# Allegro board FIBER-E1_01v0.brd
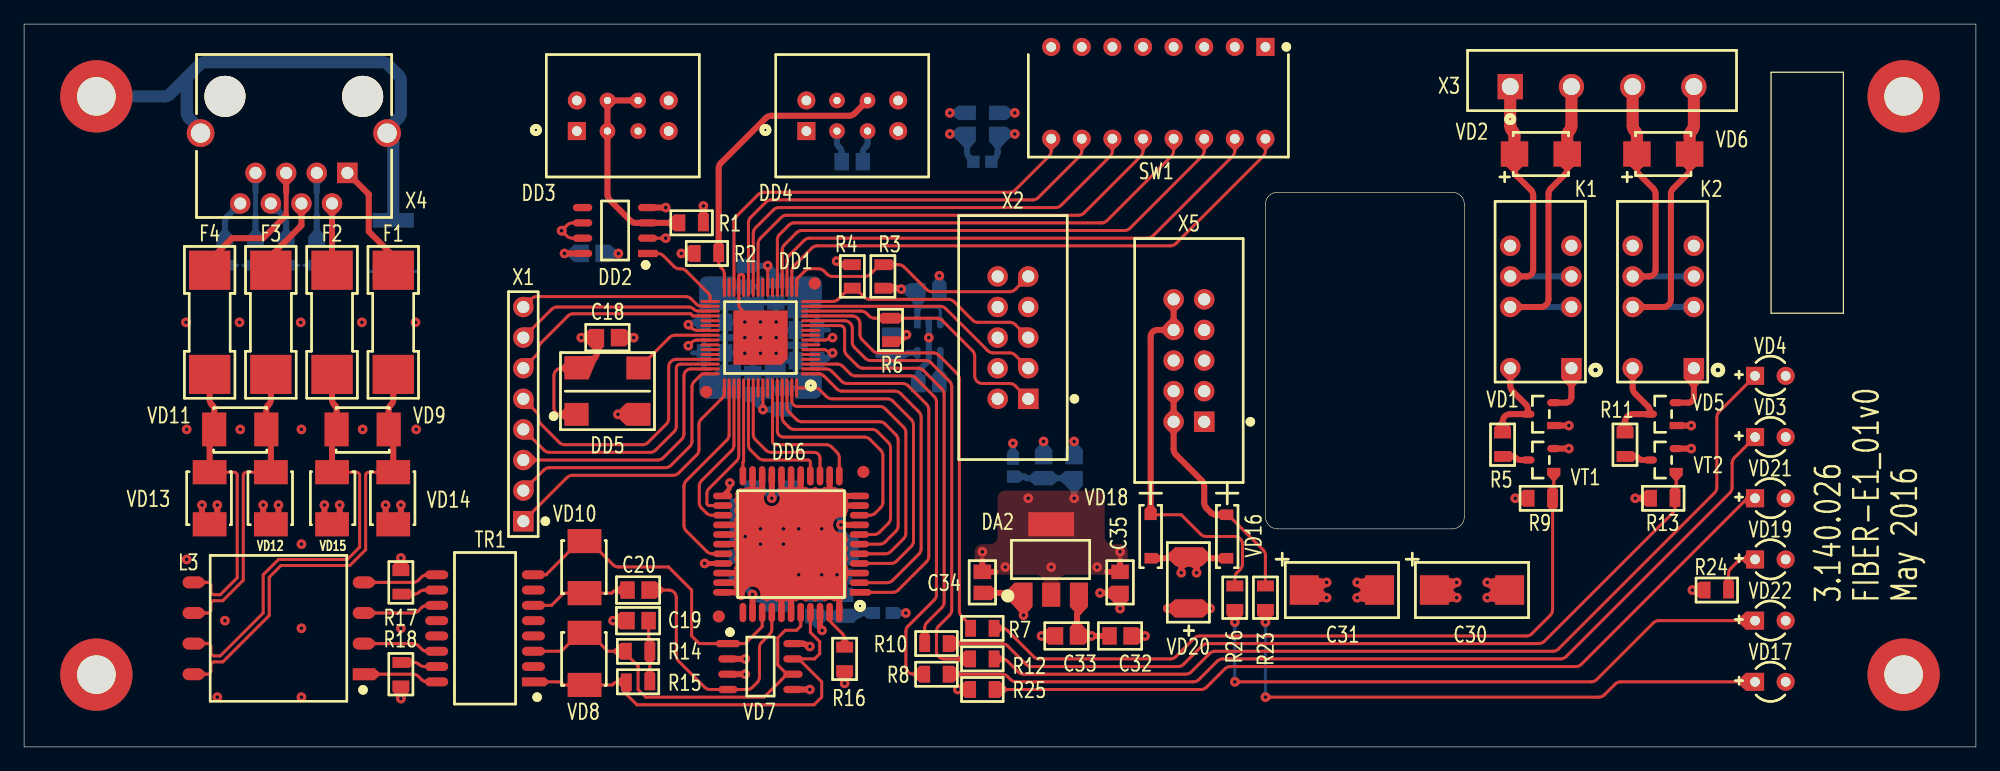
[diagram p0: board, top side]
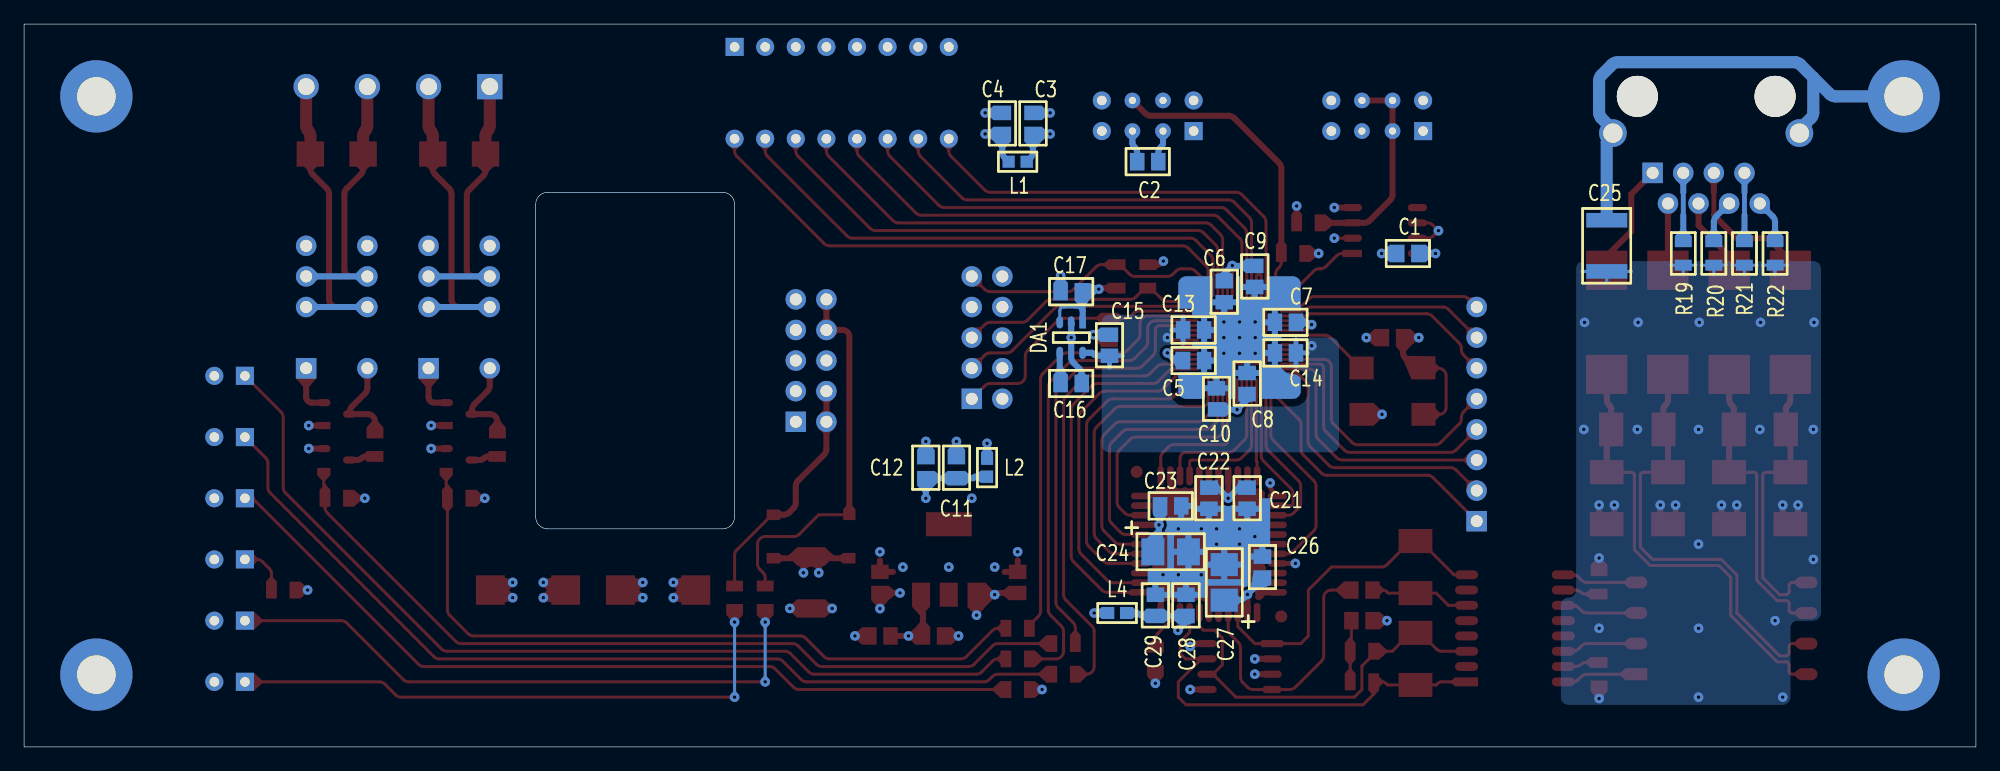
[diagram p1: board, bottom side, seen from below]

Outline 162 x 60 mm; copper layers: TOP, GND, PWR, BOTTOM. Coordinates in mm from the lower left corner of the outline.
Outline path: 0,60 0,0 162,0 162,60 0,60 ; 103.03,45.04 103.03,19.1 arc(103.32,18.39) 104.03,18.1 118.54,18.1 arc(119.25,18.39) 119.54,19.1 119.54,45.04 arc(119.25,45.75) 118.54,46.04 104.03,46.04 arc(103.32,45.75) 103.03,45.04

## Design rules (mm)
net group 2RX: nets 2RX+ 2RX-
net group 2TX: nets 2TX+ 2TX-
net group 3RX: nets 3RX+ 3RX-
net group 3TX: nets 3TX+ 3TX-
net group RX: nets RRING RTIP
net group TX: nets TRING TTIP
nets with their own width: min track width 1; nets SHLD

## Placement (name value [footprint] x y rotation side)
C1  0.1uF  [CAPC2012X130N]  47.15 40.96 0 bottom
C2  0.1uF  [CAPC2012X130N]  68.74 48.58 0 bottom
C3  2.2uF  [CAPC2012X130N]  78.27 51.76 90 bottom
C4  2.2uF  [CAPC2012X130N]  80.81 51.76 90 bottom
C5  0.1uF  [CAPC2012X130N]  64.93 32.07 180 bottom
C6  0.1uF  [CAPC2012X130N]  62.39 37.78 270 bottom
C7  0.1uF  [CAPC2012X130N]  57.31 35.24 0 bottom
C8  0.1uF  [CAPC2012X130N]  60.48 30.16 90 bottom
C9  2.2uF  [CAPC2012X130N]  59.85 39.05 270 bottom
C10  2.2uF  [CAPC2012X130N]  63.02 28.89 90 bottom
C11  0.1uF  [CAPC2012X130N]  84.61 23.18 90 bottom
C12  10uF  [CAPC2012X130N]  87.16 23.18 90 bottom
C13  0.1uF  [CAPC2012X130N]  64.93 34.61 180 bottom
C14  0.1uF  [CAPC2012X130N]  57.31 32.7 0 bottom
C15  2.2uF  [CAPC2012X130N]  71.92 33.34 90 bottom
C16  0.01uF  [CAPC2012X130N]  75.09 30.16 0 bottom
C17  2.2uF  [CAPC2012X130N]  75.09 37.78 0 bottom
C18  0.01uF  [CAPC2012X130N]  48.42 33.98 180 top
C19  0.1uF  [CAPC2012X130N]  50.96 10.48 0 top
C20  1uF  [CAPC2012X130N]  50.96 13.02 180 top
C21  0.1uF  [CAPC2012X130N]  60.48 20.64 270 bottom
C22  2.2uF  [CAPC2012X130N]  63.66 20.64 270 bottom
C23  0.1uF  [CAPC2012X130N]  66.83 20 180 bottom
C24  68uF  [CAPMP3528X190N]  66.83 16.2 180 bottom
C25  1000pF  [CAPC4532X120N]  30.64 41.59 270 bottom
C26  0.1uF  [CAPC2012X130N]  59.22 14.93 90 bottom
C27  68uF  [CAPMP3528X190N]  62.39 13.65 90 bottom
C28  0.1uF  [CAPC2012X130N]  65.56 11.75 90 bottom
C29  2.2uF  [CAPC2012X130N]  68.11 11.75 90 bottom
C30  220uF  [CAPMP7343X280N]  120.17 13.02 0 top
C31  220uF  [CAPMP7343X280N]  109.38 13.02 0 top
C32  10uF  [CAPC2012X130N]  90.97 9.21 0 top
C33  0.1uF  [CAPC2012X130N]  86.52 9.21 180 top
C34  10uF  [CAPC2012X130N]  79.53 13.65 270 top
C35  0.1uF  [CAPC2012X130N]  90.97 13.65 270 top
DA1  LP2985AIM5-1.8  [SOT95P280X112-5N]  75.09 33.98 270 bottom
DA2  ADP3339AKCZ-3.3  [SOT230P700X180-4N]  85.25 15.56 90 top
DD1  5M80ZE64C5N  [QFP40P900X900X120-65N_V1]  61.12 33.98 180 top
DD2  SN75451BD  [SOIC127P600X175-8N]  49.05 42.87 180 top
DD3  HFBR-1414Z  [AVAGO_HFBR-X41XZ]  45.88 51.12 180 top
DD4  HFBR-2412Z  [AVAGO_HFBR-X41XZ]  64.93 51.12 180 top
DD5  65.536MHz  [OSCCC500X700X140-4N]  48.42 29.53 0 top
DD6  82V2081PPG  [TQFP80P1200X1200X160-44N]  63.66 16.83 180 top
F1  04611.25ER  [FUS10132X312N]  30.64 35.24 90 top
F2  04611.25ER  [FUS10132X312N]  25.56 35.24 90 top
F3  04611.25ER  [FUS10132X312N]  20.48 35.24 90 top
F4  04611.25ER  [FUS10132X312N]  15.4 35.24 90 top
K1  G6S-2 5VDC  [RELAY_G6S224DC]  125.89 37.78 180 top
K2  G6S-2 5VDC  [RELAY_G6S224DC]  136.05 37.78 180 top
L1  BLM18HE152SN1  [INDC1608X80N]  79.53 48.58 0 bottom
L2  BLM18HE152SN1  [INDC1608X80N]  82.08 23.18 270 bottom
L3  PE-65857NL  [SOIC254P1509X864-8N]  21.11 9.85 180 top
L4  BLM18HE152SN1  [INDC1608X80N]  71.28 11.12 0 bottom
NOREF  -  []  0 0 0 top
NOREF#2  -  []  0 0 0 top
NOREF#3  VAL  [unnamed#2]  6 6 0 top
NOREF#4  VAL  [unnamed#2]  156 54 0 top
NOREF#5  VAL  [unnamed#2]  156 6 0 top
NOREF#6  -  []  0 60 90 top
NOREF#7  -  []  6 6 90 top
NOREF#8  -  []  162 0 90 top
NOREF#9  -  []  0 60 90 top
NOREF#10  -  []  6 6 0 top
NOREF#11  -  []  0 0 90 top
R1  39  [RESC2013X50N]  55.41 43.5 0 top
R2  510  [RESC2013X50N]  56.67 40.96 0 top
R3  10k  [RESC2013X50N]  71.28 39.05 270 top
R4  10k  [RESC2013X50N]  68.74 39.05 90 top
R5  5.1  [RESC2013X50N]  122.72 25.09 90 top
R6  1k  [RESC2013X50N]  71.92 34.61 90 top
R7  510  [RESC2013X50N]  79.53 9.85 0 top
R8  270  [RESC2013X50N]  75.72 6.04 0 top
R9  5.1k  [RESC2013X50N]  125.89 20.64 0 top
R10  510  [RESC2013X50N]  75.72 8.57 0 top
R11  5.1  [RESC2013X50N]  132.88 25.09 90 top
R12  270  [RESC2013X50N]  79.53 7.3 0 top
R13  5.1k  [RESC2013X50N]  136.05 20.64 0 top
R14  60.4  [RESC2013X50N]  50.96 7.94 0 top
R15  60.4  [RESC2013X50N]  50.96 5.4 0 top
R16  3.01k  [RESC2013X50N]  68.11 7.3 90 top
R17  75  [RESC2013X50N]  31.27 13.65 270 top
R18  75  [RESC2013X50N]  31.27 6.04 90 top
R19  75  [RESC2013X50N]  24.29 40.96 90 bottom
R20  75  [RESC2013X50N]  21.75 40.96 90 bottom
R21  75  [RESC2013X50N]  19.21 40.96 90 bottom
R22  75  [RESC2013X50N]  16.67 40.96 90 bottom
R23  510  [RESC2013X50N]  103.03 12.38 270 top
R24  510  [RESC2013X50N]  140.5 13.02 180 top
R25  240  [RESC2013X50N]  79.53 4.76 0 top
R26  510  [RESC2013X50N]  100.49 12.38 270 top
SW1  SWD-08R  [SW_SWD-08R]  103.03 58.1 180 top
TP1  TP  [KP_W310H180]  6 54 0 top
TR1  T1094NL  [SOIC127P928X622-16N]  38.26 9.85 180 top
VD1  BAT54S  [SOT95P230X110-3N]  125.89 27.62 180 top
VD2  300V  [DIOM5436X230N]  125.89 49.22 180 top
VD3  LOS_FI  [LEDRR254W47L320T320H460N]  144.94 25.72 0 top
VD4  LOS_E1  [LEDRR254W47L320T320H460N]  144.94 30.8 0 top
VD5  BAT54S  [SOT95P230X110-3N]  136.05 27.62 180 top
VD6  300V  [DIOM5436X230N]  136.05 49.22 180 top
VD7  SRDA05-4BTG  [SOIC127P600X175-8N]  61.12 6.67 0 top
VD8  P0080SAMCLRP  [DIOM5336X265N_PAD200_300]  46.52 7.3 90 top
VD9  P0300SCMCLRP  [DIOM5336X265N_PAD200_300]  28.1 26.36 180 top
VD10  P0080SAMCLRP  [DIOM5336X265N_PAD200_300]  46.52 14.93 90 top
VD11  P0300SCMCLRP  [DIOM5336X265N_PAD200_300]  17.94 26.36 180 top
VD12  P1800SCMCLRP  [DIOM5336X265N_PAD200_300]  20.48 20.64 90 top
VD13  P1800SCMCLRP  [DIOM5336X265N_PAD200_300]  15.4 20.64 90 top
VD14  P1800SCMCLRP  [DIOM5336X265N_PAD200_300]  30.64 20.64 90 top
VD15  P1800SCMCLRP  [DIOM5336X265N_PAD200_300]  25.56 20.64 270 top
VD16  MBR0540  [SOT95P375X128-2N]  99.86 17.46 90 top
VD17  220V  [LEDRR254W47L320T320H460N]  144.94 5.4 0 top
VD18  MBR0540  [SOT95P375X128-2N]  93.5 17.46 90 top
VD19  5V  [LEDRR254W47L320T320H460N]  144.94 15.56 0 top
VD20  6V8  [DIOM5336X265N]  96.68 13.65 270 top
VD21  3.3V  [LEDRR254W47L320T320H460N]  144.94 20.64 0 top
VD22  48V  [LEDRR254W47L320T320H460N]  144.94 10.48 0 top
VT1  IRLML6344  [SOT95P230X110-3N]  125.89 23.82 180 top
VT2  IRLML6344  [SOT95P230X110-3N]  136.05 23.82 180 top
X1  TP CPLD  [PLS-8]  41.44 18.73 90 top
X2  JTAG  [SHDR0S254P5X2_2025X900X900]  83.34 28.89 90 top
X3  RELAY  [PHOENIX_1757268]  123.35 54.81 180 top
X4  1-5406299-1  [TE_1-5406299-1]  19.21 47.65 180 top
X5  IDC-10M  [SHDR0S254P5X2_2025X900X900]  97.95 26.99 90 top

## Library data of the parts
C1-C23 C25 C26 C28 C29 C32-C35 = CAPACITOR
C24 C27 C30 C31 = CAPACITOR_POL
DA1 = LP2985_5
DA2 = LM1117
DD1 = 5M80ZE64_38: alternate symbols: (QFP40P900X900X120-65N_v2)
DD2 = SN75451B_8
DD3 = HFBR-1414Z_7
DD4 = HFBR-24x2Z_6
DD5 = OSC_SMD_3
DD6 = IDT82V2081_11
F1-F4 = EFUSE
K1 K2 = G6S224DC
L1 L2 L4 = INDUCTOR
L3 = PE-65857NL
R1-R26 = R_0.125W
SW1 = SW8
TP1 = TP
TR1 = T1094NL_0
VD1 VD5 = BAT54S
VD2 VD6 = SUPRESSOR
VD3 VD4 VD17 VD19 VD21 VD22 = LED
VD7 = SRDA05_0
VD8-VD15 = THYRISTOR_2
VD16 VD18 = SHOTTKY
VD20 = SUPRESSOR_POL
VT1 VT2 = MOS_n_channel_induced_1
X1 = CONN8
X2 = CONN10_1
X3 = CONN4_1
X4 = TJ8P8C_SHIELD_2
X5 = CONN10

## Footprints (pads in the part's own frame, mm; a bottom-side part is the same pattern mirrored in y, then rotated)
AVAGO_HFBR-X41XZ
  rect 1.5x1.5 hole 0.8: 1(0,0)
  round 1.3 hole 0.6: 2(-2.54,0) 3(-5.08,0) 6(-5.08,-2.54) 7(-2.54,-2.54)
  round 1.5 hole 0.8: 4(-7.62,0) 5(-7.62,-2.54) 8(0,-2.54)
CAPC2012X130N
  rect 1.2x1.45 smd: 1(-0.875,0) 2(0.875,0)
CAPC4532X120N
  rect 1.2x3.4 smd: 1(-2.125,0) 2(2.125,0)
CAPMP3528X190N
  rect 1.9x2.25 smd: 1(-1.475,0) 2(1.475,0)
CAPMP7343X280N
  rect 2.4x2.45 smd: 1(-3.125,0) 2(3.125,0)
DIOM5336X265N
  rect 1.52x2.3 smd: 1(-2.162,0) 2(2.162,0)
DIOM5336X265N_PAD200_300
  rect 2x2.8 smd: 1(-2.162,0) 2(2.162,0)
DIOM5436X230N
  rect 2.275x2.1 smd: 1(-2.188,0) 2(2.188,0)
FUS10132X312N
  rect 3.25x3.43 smd: 1(-4.325,0) 2(4.325,0)
INDC1608X80N
  rect 1.025x1 smd: 1(-0.75,0) 2(0.75,0)
KP_W310H180
  round 6 hole 3.2: 1(0,0)
LEDRR254W47L320T320H460N
  rect 1.5x1.5 hole 0.8: 1(-1.27,0)
  round 1.5 hole 0.8: 2(1.27,0)
OSCCC500X700X140-4N
  rect 2x1.9 smd: 1(-2.57,-1.925) 2(2.57,-1.925) 3(2.57,1.925) 4(-2.57,1.925)
PHOENIX_1757268
  rect 2.1x2.1 hole 1.4: 1(0,0)
  round 2.1 hole 1.4: 2(-5.08,0) 3(-10.16,0) 4(-15.24,0)
PLS-8
  rect 1.7x1.7 hole 1: 1(0,0)
  round 1.7 hole 1: 2(2.54,0) 3(5.08,0) 4(7.62,0) 5(10.16,0) 6(12.7,0) 7(15.24,0) 8(17.78,0)
QFP40P900X900X120-65N_V1
  round 1 smd: (-4.5,-4.5) (4.5,4.5)
  rect 1.6x0.25 smd: 1(-4.175,3)
  oval 1.6x0.25 smd: 2(-4.175,2.6) 3(-4.175,2.2) 4(-4.175,1.8) 5(-4.175,1.4) 6(-4.175,1) 7(-4.175,0.6) 8(-4.175,0.2) 9(-4.175,-0.2) 10(-4.175,-0.6) 11(-4.175,-1) 12(-4.175,-1.4) 13(-4.175,-1.8) 14(-4.175,-2.2) 15(-4.175,-2.6) 16(-4.175,-3) 33(4.175,-3) 34(4.175,-2.6) 35(4.175,-2.2) 36(4.175,-1.8) 37(4.175,-1.4) 38(4.175,-1) 39(4.175,-0.6) 40(4.175,-0.2) 41(4.175,0.2) 42(4.175,0.6) 43(4.175,1) 44(4.175,1.4) 45(4.175,1.8) 46(4.175,2.2) 47(4.175,2.6) 48(4.175,3)
  oval 0.25x1.6 smd: 17(-3,-4.175) 18(-2.6,-4.175) 19(-2.2,-4.175) 20(-1.8,-4.175) 21(-1.4,-4.175) 22(-1,-4.175) 23(-0.6,-4.175) 24(-0.2,-4.175) 25(0.2,-4.175) 26(0.6,-4.175) 27(1,-4.175) 28(1.4,-4.175) 29(1.8,-4.175) 30(2.2,-4.175) 31(2.6,-4.175) 32(3,-4.175) 49(3,4.175) 50(2.6,4.175) 51(2.2,4.175) 52(1.8,4.175) 53(1.4,4.175) 54(1,4.175) 55(0.6,4.175) 56(0.2,4.175) 57(-0.2,4.175) 58(-0.6,4.175) 59(-1,4.175) 60(-1.4,4.175) 61(-1.8,4.175) 62(-2.2,4.175) 63(-2.6,4.175) 64(-3,4.175)
  custom 4.5x4.5 smd: EPAD(0,0)
RELAY_G6S224DC
  rect 1.7x1.7 hole 1: 1(-2.54,6.35)
  round 1.7 hole 1: 3(-2.54,1.27) 4(-2.54,-1.27) 5(-2.54,-3.81) 8(2.54,-3.81) 9(2.54,-1.27) 10(2.54,1.27) 12(2.54,6.35)
RESC2013X50N
  rect 0.9x1.4 smd: 1(-0.975,0) 2(0.975,0)
SHDR0S254P5X2_2025X900X900
  rect 1.7x1.7 hole 1: 1(0,0)
  round 1.7 hole 1: 2(0,2.54) 3(2.54,0) 4(2.54,2.54) 5(5.08,0) 6(5.08,2.54) 7(7.62,0) 8(7.62,2.54) 9(10.16,0) 10(10.16,2.54)
SOIC127P600X175-8N
  rect 1.6x0.6 smd: 1(-2.7,1.905)
  oval 1.6x0.6 smd: 2(-2.7,0.635) 3(-2.7,-0.635) 4(-2.7,-1.905) 5(2.7,-1.905) 6(2.7,-0.635) 7(2.7,0.635) 8(2.7,1.905)
SOIC127P928X622-16N
  rect 1.91x0.74 smd: 1(-4.015,4.445)
  oval 1.91x0.74 smd: 2(-4.015,3.175) 3(-4.015,1.905) 4(-4.015,0.635) 5(-4.015,-0.635) 6(-4.015,-1.905) 7(-4.015,-3.175) 8(-4.015,-4.445) 9(4.015,-4.445) 10(4.015,-3.175) 11(4.015,-1.905) 12(4.015,-0.635) 13(4.015,0.635) 14(4.015,1.905) 15(4.015,3.175) 16(4.015,4.445)
SOIC254P1509X864-8N
  rect 1.8x1 smd: 1(-7.062,3.81)
  oval 1.8x1 smd: 2(-7.062,1.27) 3(-7.062,-1.27) 4(-7.062,-3.81) 5(7.062,-3.81) 6(7.062,-1.27) 7(7.062,1.27) 8(7.062,3.81)
SOT95P230X110-3N
  rect 1.1x0.6 smd: 1(-1.075,0.95)
  oval 1.1x0.6 smd: 2(-1.075,-0.95) 3(1.075,0)
SOT95P280X112-5N
  rect 1x0.55 smd: 1(-1.262,0.95)
  oval 1x0.55 smd: 2(-1.262,0) 3(-1.262,-0.95) 4(1.262,-0.95) 5(1.262,0.95)
SOT95P375X128-2N
  rect 0.88x1.02 smd: 1(-1.805,0) 2(1.805,0)
SOT230P700X180-4N
  rect 2x1.5 smd: 1(-2.925,2.3) 2(-2.925,0) 3(-2.925,-2.3)
  rect 2x3.8 smd: 4(2.925,0)
SW_SWD-08R
  rect 1.5x1.5 hole 0.8: 1(0,0)
  round 1.5 hole 0.8: 2(2.54,0) 3(5.08,0) 4(7.62,0) 5(10.16,0) 6(12.7,0) 7(15.24,0) 8(17.78,0) 9(17.78,7.62) 10(15.24,7.62) 11(12.7,7.62) 12(10.16,7.62) 13(7.62,7.62) 14(5.08,7.62) 15(2.54,7.62) 16(0,7.62)
TE_1-5406299-1
  round 3.4 hole 3.4: (-8.89,-6.35) (2.54,-6.35)
  rect 1.7x1.7 hole 1: 1(-7.62,0)
  round 1.7 hole 1: 2(-6.35,2.54) 3(-5.08,0) 4(-3.81,2.54) 5(-2.54,0) 6(-1.27,2.54) 7(0,0) 8(1.27,2.54)
  round 2.3 hole 1.6: SHIELD1(-10.92,-3.3) SHIELD2(4.56,-3.3)
TQFP80P1200X1200X160-44N
  round 1 smd: (-6,-6) (6,6)
  rect 1.6x0.55 smd: 1(-5.675,4)
  oval 1.6x0.55 smd: 2(-5.675,3.2) 3(-5.675,2.4) 4(-5.675,1.6) 5(-5.675,0.8) 6(-5.675,0) 7(-5.675,-0.8) 8(-5.675,-1.6) 9(-5.675,-2.4) 10(-5.675,-3.2) 11(-5.675,-4) 23(5.675,-4) 24(5.675,-3.2) 25(5.675,-2.4) 26(5.675,-1.6) 27(5.675,-0.8) 28(5.675,0) 29(5.675,0.8) 30(5.675,1.6) 31(5.675,2.4) 32(5.675,3.2) 33(5.675,4)
  oval 0.55x1.6 smd: 12(-4,-5.675) 13(-3.2,-5.675) 14(-2.4,-5.675) 15(-1.6,-5.675) 16(-0.8,-5.675) 17(0,-5.675) 18(0.8,-5.675) 19(1.6,-5.675) 20(2.4,-5.675) 21(3.2,-5.675) 22(4,-5.675) 34(4,5.675) 35(3.2,5.675) 36(2.4,5.675) 37(1.6,5.675) 38(0.8,5.675) 39(0,5.675) 40(-0.8,5.675) 41(-1.6,5.675) 42(-2.4,5.675) 43(-3.2,5.675) 44(-4,5.675)
unnamed#2
  round 6 hole 3.2: 1(0,0)

## Nets
GND: C1.2 C2.2 C3.2 C4.2 C5.2 C6.2 C7.2 C8.2 C9.2 C10.2 C11.2 C12.2 C13.2 C14.2 C15.2 C16.1 C17.2 C18.1 C19.1 C21.2 C22.2 C23.2 C24.2 C26.2 C27.2 C28.2 C29.2 C30.2 C31.2 C32.2 C33.2 C34.2 C35.2 DA1.2(GND) DA2.1(GND) DD1.28(OE) DD1.29(CLRN) DD1.EPAD(GND) DD2.4(GND) DD3.1(NC#1) DD3.3(CATHODE) DD3.4(NC#4) DD3.5(NC#5) DD3.8(NC#8) DD4.1(NC#1) DD4.3(COM#3) DD4.4(NC#4) DD4.5(NC#5) DD4.7(COM#7) DD4.8(NC#8) DD5.2(GND) DD6.3(TDN) DD6.10(GNDD) DD6.11(RCLKE) DD6.13(THZ) DD6.16(MODE0) DD6.17(MODE1) DD6.18(GNDIO) DD6.20(RXTXM0) DD6.21(RXTXM1) DD6.26(PATT0) DD6.27(PATT1) DD6.28(RPD) DD6.31(PULS1) DD6.32(PULS2) DD6.33(PULS3) DD6.38(GNDT) DD6.39(GNDA) DD6.44(IC_2) R6.1 R9.1 R13.1 R16.1 SW1.1(A1) SW1.2(A2) SW1.3(A3) SW1.4(A4) SW1.5(A5) SW1.6(A6) SW1.7(A7) SW1.8(A8) VD1.1 VD3.2(CATHODE) VD4.2(CATHODE) VD5.1 VD7.5(REF2) VD7.8(REF2_1) VD17.2(CATHODE) VD19.2(CATHODE) VD20.2(ANODE) VD21.2(CATHODE) VD22.2(CATHODE) VT1.2(S) VT2.2(S) X2.2(GND#2) X2.10(GND#10) X5.1 X5.3 X5.5 X5.7 X5.9
2RX+: DD6.41(RTIP) R15.1 TR1.1 VD7.7(IO4) VD8.1(CATHODE)
2RX-: DD6.40(RRING) R14.1 TR1.3 VD7.6(IO3) VD8.2(ANODE)
2TX+: C20.2 TR1.6 VD10.1(CATHODE)
2TX-: DD6.36(TRING) TR1.8 VD7.1(IO1) VD10.2(ANODE)
3RX+: F1.1 L3.8 VD9.1(CATHODE) VD14.2(ANODE)
3RX-: F2.1 L3.7 VD9.2(ANODE) VD15.1(CATHODE)
3TX+: F3.1 L3.6 VD11.1(CATHODE) VD12.2(ANODE)
3TX-: F4.1 L3.5 VD11.2(ANODE) VD13.2(ANODE)
#RST: DD1.59(IO_50) DD6.12(\\R\S\T\)
+1.8B: C13.1 C14.1 C15.1 DA1.5(VOUT) DD1.8(VCCINT#8) DD1.41(VCCINT#41)
+3.3B: C11.1 C12.1 C21.1 C22.1 C23.1 C24.1 C26.1 C27.1 C34.1 C35.1 DA2.2(VO#2) DA2.4(VO#4) DD6.8(VDDD) DD6.19(VDDIO) DD6.23(TERM) DD6.30(PULS0) DD6.35(VDDT) L2.2 L4.2 R25.1 VD7.2(REF1) VD7.3(REF1_1)
+3.3B_CPLD: C5.1 C6.1 C7.1 C8.1 C9.1 C10.1 C17.1 C18.2 DA1.1(VIN) DA1.3(ON/OFF) DD1.6(VCCIO1#6) DD1.23(VCCIO1#23) DD1.39(VCCIO2#39) DD1.57(VCCIO2#57) DD5.1(OE) DD5.4(VCC) L2.1 R3.2 R4.2 X2.4(VDD)
+5B: C4.1 C30.1 C31.1 C32.1 C33.1 DA2.3(VI) K1.1(IN+) K2.1(IN+) L1.2 R24.2 VD1.2 VD5.2 VD16.1(CATHODE) VD18.1(CATHODE) VD20.1(CATHODE)
+5B_48: R26.1 VD18.2(ANODE) X5.8 X5.10
+5B_220: R23.1 VD16.2(ANODE) X5.2 X5.4
+5B_FI: C1.1 C2.1 C3.1 DD2.2(1B) DD2.6(2A) DD2.7(2B) DD2.8(VCC) DD4.2(VCC) L1.1 R1.2 R2.1
CLK: DD1.40(CLK2) DD5.3(OUT)
CV: DD1.62(IO_53) DD6.6(CV)
EQ: DD1.50(IO_42) DD6.29(EQ)
F_RX: DD1.32(IO_26) DD4.6(DATA) R2.2
F_TX: DD1.33(IO_27) DD2.1(1A)
JA0: DD1.55(IO_47) DD6.14(JA0)
JA1: DD1.54(IO_46) DD6.15(JA1)
LOS: DD1.61(IO_52) DD6.7(LOS)
LOS_E1: DD1.11(IO_10) R10.1
LOS_FI: DD1.13(IO_12) R7.1
LP0: DD1.52(IO_44) DD6.24(LP0)
LP1: DD1.51(IO_43) DD6.25(LP1)
MCLK: DD1.60(IO_51) DD6.9(MCLK)
MONT: DD1.53(IO_45) DD6.22(MONT)
RCLK: DD1.64(IO_1) DD6.4(RCLK)
RD: DD1.63(IO_54) DD6.5(RD)
RRING: F2.2 X4.2(RRING)
RTIP: F1.2 X4.1(RTIP)
SHLD: C25.1 TP1.1 X4.SHIELD1(SHLD1) X4.SHIELD2(SHLD2)
SW_INV: DD1.20(IO_15) SW1.14(A14)
SW_JA0: DD1.25(IO_19) SW1.12(A12)
SW_JA1: DD1.21(IO_16) SW1.13(A13)
SW_LHAUL: DD1.18(IO_13) SW1.16(A16)
SW_LP0: DD1.30(IO_24) SW1.9(A9)
SW_LP1: DD1.27(IO_21) SW1.10(A10)
SW_LP2: DD1.26(IO_20) SW1.11(A11)
SW_MCLK: DD1.19(IO_14) SW1.15(A15)
TCK: DD1.14(TMS) R6.2 X2.1(TCK)
TCLK: DD1.2(IO_3) DD6.1(TCLK)
TD: DD1.1(IO_2) DD6.2(TDP/TD)
TDI: DD1.17(TDO) R3.1 X2.9(TDI)
TDO: DD1.15(TDI) X2.3(TDO)
TMS: DD1.16(TCK) R4.1 X2.5(TMS)
TP0: DD1.49(IO_41) X1.1
TP1: DD1.48(IO_40) X1.2
TP2: DD1.47(IO_39) X1.3
TP3: DD1.46(IO_38) X1.4
TP4: DD1.45(IO_37) X1.5
TP5: DD1.36(IO_30) X1.6
TP6: DD1.35(IO_29) X1.7
TP7: DD1.34(IO_28) X1.8
TRING: F4.2 X4.5(TRING)
TTIP: F3.2 X4.4(TTIP)
N930427: K1.4(01) K1.9(02) VD2.2(CATHODE) X3.1(LFI+)
N930443: K1.3(NC1) K1.10(NC2) VD2.1(ANODE) X3.2(LFI-)
N930725: K1.12(IN-) R5.2 VD1.3
N1544031: K2.4(01) K2.9(02) VD6.2(CATHODE) X3.3(LE1+)
N1544059: K2.3(NC1) K2.10(NC2) VD6.1(ANODE) X3.4(LE1-)
N1544095: K2.12(IN-) R11.2 VD5.3
N1545189: R24.1 VD19.1(ANODE)
N1624810: R18.2 TR1.15(P15)
N1624814: C19.2 R14.2 R15.2
N1624836: C25.2 R17.1 R18.1 R19.1 R20.1 R21.1 R22.1 VD12.1(CATHODE) VD13.1(CATHODE) VD14.1(CATHODE) VD15.2(ANODE)
N1624848: L3.1 TR1.16(P16)
N1624856: L3.2 TR1.14(P14)
N1624864: R17.2 TR1.10(P10)
N1624906: L3.3 TR1.11(P11)
N1624970: L3.4 TR1.9(P9)
N1625492: R19.2 X4.3(NC3)
N1625496: R20.2 X4.6(NC6)
N1625500: R21.2 X4.7(NC7)
N1625504: R22.2 X4.8(NC8)
N1631299: C28.1 C29.1 DD6.42(VDDA) L4.1
N1637829: C20.1 DD6.37(TTIP) VD7.4(IO2)
N1638775: DD6.43(REF) R16.2
N1725933: R25.2 VD21.1(ANODE)
N1741968: R5.1 VT1.3(D)
N1742482: R7.2 R9.2 VT1.1(G)
N1747861: R11.1 VT2.3(D)
N1748088: R10.2 R13.2 VT2.1(G)
N1759880: DD1.12(IO_11) R12.1
N1759884: DD1.3(IO_4) R8.1
N1760125: R8.2 VD3.1(ANODE)
N1760541: R12.2 VD4.1(ANODE)
N1763106: R26.2 VD22.1(ANODE)
N1775019: R23.2 VD17.1(ANODE)
N1823155: DD2.3(1Y) DD3.2(ANODE#2) DD3.6(ANODE#6) DD3.7(ANODE#7) R1.1
N1852309: C16.2 DA1.4(BYPASS)

Pads without a net: DD1 4 5 7 9 10 22 24 31 37 38 42 43 44 56 58; DD2 5; DD6 34; K1 5 8; K2 5 8; NOREF#3 1; NOREF#4 1; NOREF#5 1; TR1 2 4 5 7 12 13; X2 6 7 8; X5 6

## Via types
v1: diameter 0.8, hole 0.3, TOP to BOTTOM, 125 vias

## Routing (per net, layer and track width the routed paths; a pad name or vN(x,y) marks a point on that pad's centre or on a via; arc(x,y) is an arc through that point)
GND: length 242.9
  TOP w0.25: DD1.28 59.72,39.08 arc(59.68,39.16) 59.6,39.2 59.4,39.2 arc(59.34,39.18) 59.32,39.12 DD1.29 59.32,36.76 arc(59.37,36.52) 59.51,36.31 59.63,36.19 arc(59.77,35.98) 59.82,35.74 v1(59.82,35.27)
  TOP w0.5: C34.2 81.09,12.78 arc(81.28,12.74) v1(81.44,12.63) DA2.1 v1(82.95,10.94) ; C18.1 v1(50.59,33.98) ; DD5.2 v1(49.29,27.61) ; v1(65.22,8.34) 65.2,8.34 arc(65.05,8.37) 64.92,8.46 arc(64.78,8.54) 64.63,8.57 VD7.8 ; VD1.1 v1(128.22,26.68) ; DD2.4 v1(53.26,44.77) ; v1(89.3,12.78) C35.2 v1(90.97,11.48) ; 64.46,21.35 DD6.16 ; R9.1 v1(123.77,20.64) ; C33.2 v1(84.44,9.21) ; v1(110.65,13.65) 111.92,13.65 arc(112.33,13.48) 112.5,13.07 C31.2 112.5,12.97 arc(112.33,12.56) 111.92,12.38 v1(110.65,12.38) ; 67.66,11.15 67.66,12.31 ; DD6.27 59.14,17.63 ; C19.1 v1(48.88,10.48) ; DD6.28 59.14,16.83 ; 62.86,21.35 DD6.18 ; v1(121.44,13.65) 122.72,13.65 arc(123.13,13.48) 123.3,13.07 C30.2 123.3,12.97 arc(123.13,12.56) 122.72,12.38 v1(121.44,12.38) ; R13.1 v1(133.72,20.64) ; DD6.26 59.14,18.43 ; VT1.2 v1(128.22,24.77) ; 63.66,21.35 DD6.17 ; VD7.5 v1(65.22,4.76) ; 68.18,14.43 DD6.3 ; 61.26,21.35 DD6.20 ; 60.46,21.35 DD6.21 ; 66.86,21.35 DD6.13 ; 62.86,11.15 62.86,12.31 ; v1(98.44,11.49) VD20.2 v1(94.93,11.49) ; 68.18,20.83 DD6.11 ; 68.18,20.03 DD6.10 ; 63.66,11.15 63.66,12.31 ; R16.1 v1(68.11,5.28) ; VD5.1 v1(138.38,26.68) ; DD6.32 59.14,13.63 ; VT2.2 v1(138.38,24.77) ; v1(73.24,34.22) 72.85,33.82 arc(72.64,33.68) 72.4,33.63 R6.1 ; DD6.33 59.14,12.83 ; C32.2 v1(93.04,9.21) ; DD6.31 59.14,14.43
  GND w0.5: 146.21,29.7 VD4.2 ; VD4.2 145.11,30.8 ; VD4.2 147.31,30.8 ; VD4.2 146.21,31.9 ; SW1.8 85.25,56.2 ; DD3.4 54.6,51.12 ; DD3.4 52.4,51.12 ; DD3.4 53.5,50.02 ; DD3.4 53.5,52.22 ; 66.47,53.66 DD4.7 ; DD4.7 67.47,54.66 ; DD4.7 67.47,52.66 ; DD4.7 68.47,53.66 ; 145.11,15.56 VD19.2 ; VD19.2 146.21,14.46 ; VD19.2 146.21,16.66 ; VD19.2 147.31,15.56 ; VD3.2 146.21,26.82 ; VD3.2 146.21,24.62 ; VD3.2 147.31,25.72 ; VD3.2 145.11,25.72 ; 63.83,53.66 DD4.8 ; DD4.8 66.03,53.66 ; DD4.8 64.93,52.56 ; DD4.8 64.93,54.76 ; 97,28.58 X5.3 99.15,29.53 ; 99.15,34.61 X5.7 97,33.66 ; VD22.2 146.21,11.58 ; VD22.2 147.31,10.48 ; VD22.2 145.11,10.48 ; VD22.2 146.21,9.38 ; DD3.5 53.5,54.76 ; DD3.5 54.6,53.66 ; DD3.5 53.5,52.56 ; DD3.5 52.4,53.66 ; DD4.4 73.65,51.12 ; DD4.4 72.55,52.22 ; DD4.4 72.55,50.02 ; DD4.4 71.45,51.12 ; SW1.2 100.49,56.2 ; 50.96,50.12 DD3.3 ; DD3.3 51.96,51.12 ; DD3.3 49.96,51.12 ; DD3.3 50.96,52.12 ; 63.83,51.12 DD4.1 ; DD4.1 66.03,51.12 ; DD4.1 64.93,50.02 ; DD4.1 64.93,52.22 ; 146.21,4.3 VD17.2 ; VD17.2 147.31,5.4 ; VD17.2 145.11,5.4 ; VD17.2 146.21,6.5 ; SW1.1 103.03,56.2 ; DD4.5 73.65,53.66 ; DD4.5 72.55,54.76 ; DD4.5 72.55,52.56 ; DD4.5 71.45,53.66 ; 45.88,52.56 DD3.8 ; DD3.8 44.78,53.66 ; DD3.8 46.98,53.66 ; DD3.8 45.88,54.76 ; SW1.7 87.79,56.2 ; 146.21,19.54 VD21.2 ; VD21.2 145.11,20.64 ; VD21.2 146.21,21.74 ; VD21.2 147.31,20.64 ; 97.95,25.79 X5.1 99.15,26.99 ; DD4.3 71.01,51.12 ; DD4.3 70.01,50.12 ; DD4.3 70.01,52.12 ; DD4.3 69.01,51.12 ; 99.15,37.15 X5.9 97.95,38.35 ; 79.6,28.89 X2.2 80.81,27.69 ; SW1.4 95.41,56.2 ; 99.15,32.07 X5.5 97,31.12 ; 44.78,51.12 DD3.1 ; DD3.1 45.88,52.22 ; DD3.1 45.88,50.02 ; DD3.1 46.98,51.12 ; SW1.3 97.95,56.2 ; SW1.5 92.87,56.2 ; 79.6,39.05 X2.10 80.81,40.26 ; SW1.6 90.33,56.2
  BOTTOM w0.5: C10.2 63.02,30.72 ; C10.2 64.1,29.77 ; C10.2 61.95,29.77 ; C11.2 v1(84.61,25.36) ; 65.36,14.72 C24.2 ; C24.2 65.36,17.67 ; C24.2 64.06,16.2 ; C24.2 66.66,16.2 ; 64.49,12.62 C28.2 ; C28.2 66.64,12.62 ; C28.2 65.56,13.58 ; 59.22,16.75 C26.2 60.29,15.8 ; 63.1,32.07 C5.2 ; C5.2 64.06,33.15 ; C5.2 64.06,30.99 ; 62.58,19.77 C22.2 ; C22.2 64.74,19.77 ; C22.2 63.66,18.81 ; C1.2 v1(49.33,40.96) ; 60.91,15.13 C27.2 ; C27.2 63.87,15.13 ; C27.2 62.39,13.83 ; C27.2 62.39,16.43 ; 63.1,34.61 C13.2 ; C13.2 64.06,35.69 ; C13.2 64.06,33.53 ; C7.2 58.19,36.32 ; C7.2 59.14,35.24 ; C7.2 58.19,34.17 ; 61.31,36.91 C6.2 ; C6.2 63.47,36.91 ; C6.2 62.39,35.96 ; C9.2 60.93,38.18 ; C9.2 59.85,37.23 ; C9.2 58.77,38.18 ; 58.19,31.63 C14.2 ; C14.2 59.14,32.7 ; C14.2 58.19,33.78 ; DA1.2 v1(75.09,33.98) 75.09,32.33 arc(75.04,32.09) 74.9,31.88 74.4,31.38 arc(74.26,31.17) 74.22,30.93 C16.1 ; 65.96,18.93 C23.2 65.01,20 ; C3.2 v1(76.84,52.63) ; DD4.3 70.01,50.1 arc(69.99,49.98) 69.92,49.88 69.8,49.76 arc(69.66,49.56) 69.61,49.31 C2.2 ; C17.2 v1(75.97,39.11) ; C21.2 61.56,19.77 ; C21.2 60.48,18.81 ; C21.2 59.41,19.77 ; C15.2 v1(73.24,34.22) ; C4.2 v1(82.23,52.63) ; C12.2 v1(87.16,25.36) ; C8.2 60.48,31.99 ; C8.2 59.41,31.04 ; C8.2 61.56,31.04 ; 67.03,12.62 C29.2 68.11,13.58
  vias: v1(59.82,33.98) v1(59.82,32.67) v1(59.85,17.46) v1(61.12,35.27) v1(61.12,33.98) v1(61.12,32.67) v1(61.12,18.1) v1(61.12,16.83) v1(62.42,35.27) v1(62.42,33.98) v1(62.42,32.67) v1(63.02,18.1) v1(63.02,16.83) v1(64.3,18.1) v1(64.3,14.29) v1(66.2,18.1) v1(66.2,14.29) v1(67.47,14.29)
2RX+: length 35.9
  TOP w0.25: 64.3,7.3 65.61,7.3 66.03,7.74 66.03,8.73 65.26,9.51 65.26,11.15 ; 64.3,7.3 VD7.7 ; 64.3,7.3 66.2,5.4 66.2,4.13 65.56,3.5 50.86,3.5 49.98,4.37 R15.1 49.27,5.4 arc(49.1,5.37) 48.96,5.27 48.83,5.14 VD8.1 44.79,5.14 44.66,5.27 arc(44.52,5.37) 44.35,5.4 TR1.1
2RX-: length 33.2
  TOP w0.25: 64.46,11.15 64.46,10.03 64.12,9.69 63.19,9.69 62.55,9.05 62.55,6.8 63.32,6.04 ; 63.32,6.04 62.88,5.59 62.88,5.58 61.42,4.13 51.59,4.13 50.96,4.76 50.96,6.71 50.16,7.51 arc(50.03,7.71) R14.1 48.44,7.94 46.91,9.47 46.12,9.47 44.77,8.13 arc(44.57,7.99) 44.33,7.94 TR1.3 ; 63.32,6.04 VD7.6
2TX+: length 8.3
  TOP w0.25: C20.2 49.22,13.02 arc(49.05,12.99) 48.91,12.89 48.78,12.76 VD10.1 44.79,12.76 43.78,11.75 TR1.6
2TX-: length 27.6
  TOP w0.25: TR1.8 43.34,14.29 43.34,14.31 46.12,17.09 VD10.2 46.91,17.09 48.88,15.12 arc(49.09,14.98) 49.33,14.94 53.49,14.94 55.41,13.02 55.41,9.21 56.04,8.57 VD7.1 59.85,8.57 61.26,9.98 61.26,11.15
3RX+: length 37.8
  TOP w0.25: VD14.2 28.6,22.8 arc(28.42,22.73) 28.35,22.55 28.35,16.37 27.04,15.06 21.32,15.06 20.34,14.08 20.34,10.91 16.49,7.05 15.76,7.05 arc(15.58,6.98) 15.51,6.8 15.51,6.29 arc(15.43,6.11) 15.26,6.04 L3.8
  TOP w0.5: F1.1 30.64,28.85 arc(30.59,28.6) 30.45,28.4 30.36,28.3 arc(30.29,28.19) 30.26,28.07 VD9.1 30.45,26.16 arc(30.59,25.96) 30.64,25.71 VD14.2
3RX-: length 37
  TOP w0.25: VD15.1 27.6,22.8 arc(27.78,22.73) 27.85,22.55 27.85,16.58 26.83,15.56 21.11,15.56 19.84,14.29 19.84,11.12 16.29,7.55 15.76,7.55 arc(15.58,7.63) 15.51,7.8 15.51,8.32 arc(15.43,8.5) 15.26,8.57 L3.7
  TOP w0.5: F2.1 25.56,28.85 arc(25.61,28.6) 25.75,28.4 25.84,28.3 arc(25.91,28.19) 25.94,28.07 VD9.2 25.75,26.16 arc(25.61,25.96) 25.56,25.71 VD15.1
3TX+: length 25.2
  TOP w0.25: VD12.2 18.44,22.8 arc(18.26,22.73) 18.19,22.55 18.19,13.83 16.49,12.13 15.76,12.13 arc(15.58,12.06) 15.51,11.88 15.51,11.37 arc(15.43,11.19) 15.26,11.12 L3.6
  TOP w0.5: F3.1 20.48,28.85 arc(20.43,28.6) 20.29,28.4 20.2,28.3 arc(20.13,28.19) 20.1,28.07 VD11.1 20.29,26.16 arc(20.43,25.96) 20.48,25.71 VD12.2
3TX-: length 24.3
  TOP w0.25: VD13.2 17.44,22.8 arc(17.62,22.73) 17.69,22.55 17.69,14.04 16.29,12.63 15.76,12.63 arc(15.58,12.71) 15.51,12.88 15.51,13.4 arc(15.43,13.58) 15.26,13.65 L3.5
  TOP w0.5: VD13.2 15.4,25.71 arc(15.45,25.96) 15.59,26.16 VD11.2 15.78,28.07 arc(15.75,28.19) 15.69,28.3 15.59,28.4 arc(15.45,28.6) 15.4,28.85 F4.1
#RST: length 12.2
  TOP w0.25: DD1.59 62.12,25.36 arc(62.2,25.16) 62.39,25.09 66.57,25.09 arc(66.82,25.04) 67.02,24.9 67.47,24.45 arc(67.61,24.24) 67.66,24 DD6.12
+1.8B: length 14.4
  TOP w0.25: DD1.41 55.87,33.77 arc(55.62,33.73) 55.42,33.59 v1(55.13,33.3) ; v1(67.11,33.98) 66.98,33.98 arc(66.85,33.95) 66.73,33.88 arc(66.62,33.8) 66.49,33.77 DD1.8
  BOTTOM w0.4: 65.81,33.53 C13.1 ; C13.1 65.81,35.69 ; C13.1 66.76,34.61 ; 71.92,31.51 C15.1 70.84,32.47 ; 56.44,31.63 C14.1 ; C14.1 55.48,32.7 ; C14.1 56.44,33.78
  BOTTOM w0.5: DA1.5 73.34,32.71 73.21,32.59 arc(73.08,32.5) 72.92,32.47 C15.1
+3.3B: length 35.5
  TOP w0.4: v1(58.58,21.91) 58.58,21.69 arc(58.53,21.45) 58.39,21.24 DD6.23 ; DD6.30 v1(56.48,15.23)
  TOP w0.5: VD7.3 v1(59.85,6.04) ; DD6.19 v1(62.06,20.64) ; DD6.8 v1(67.8,18.43) ; 89.89,14.53 C35.1 90.97,15.48 ; 79.53,15.48 C34.1 80.61,14.53 ; 60.46,11.15 v1(60.46,12.65) ; R25.1 v1(77.51,4.76) ; VD7.2 v1(59.85,7.3)
  BOTTOM w0.5: C21.1 60.92,21.52 arc(61.17,21.47) 61.37,21.33 v1(62.06,20.64) 62.75,21.33 arc(62.95,21.47) 63.2,21.52 C22.1 ; C23.1 67.71,18.52 v1(67.8,18.43) 67.8,16.97 arc(67.85,16.72) 67.99,16.52 C24.1 ; L2.2 83.08,22.43 83.21,22.3 C11.1 C12.1 v1(87.16,20.64) ; L4.2 v1(73.19,11.12) ; C27.1 61.2,12.18 arc(60.95,12.23) 60.75,12.37 v1(60.46,12.65) 59.32,13.79 arc(59.24,13.91) C26.1
  vias: v1(79.53,16.2) v1(81.44,14.93) v1(83.34,20.64) v1(85.25,14.93) v1(89.06,14.93) v1(90.97,16.2)
+3.3B_CPLD: length 43
  TOP w0.25: DD5.4 45.83,31.43 44.61,31.43 arc(44.16,31.25) 43.98,30.8 43.98,28.15 arc(44.14,27.77) 44.52,27.61 DD5.1 ; v1(67.11,32.7) 67.03,32.7 arc(66.85,32.74) 66.7,32.84 arc(66.55,32.94) 66.38,32.98 DD1.6 ; DD1.39 55.87,34.58 arc(55.63,34.62) 55.42,34.76 v1(55.13,35.05) ; DD1.23 v1(61.72,39.96) ; DD1.57 v1(61.32,28)
  TOP w0.5: v1(67.44,40.33) 67.47,40.33 67.62,40.18 arc(67.78,40.07) 67.97,40.03 R4.2 ; R3.2 72.72,38.08 v1(72.8,38) ; DD5.4 46.27,31.45 arc(46.51,31.5) 46.72,31.64 47.36,32.28 arc(47.5,32.48) 47.55,32.73 C18.2 v1(46.24,33.98)
  PWR w0.5: 79.6,31.43 X2.4 79.86,30.48
  BOTTOM w0.25: 74.14,36.2 74.27,36.33 arc(74.47,36.47) 74.72,36.52 75.72,36.52 arc(75.95,36.42) 76.04,36.2 DA1.3
  BOTTOM w0.5: C7.1 55.67,35.24 arc(55.55,35.22) 55.44,35.15 arc(55.33,35.08) 55.21,35.05 v1(55.13,35.05) ; v1(67.11,32.7) 66.66,32.26 arc(66.45,32.12) 66.21,32.07 C5.1 ; C10.1 63,28 v1(61.32,28) 60.67,28.65 arc(60.53,28.85) 60.48,29.1 C8.1 ; L2.1 v1(82.08,25.2) ; C9.1 61.69,39.93 v1(61.72,39.96) 62.2,39.48 arc(62.34,39.27) 62.39,39.03 C6.1 ; v1(72.8,38) 73.74,38 arc(73.98,37.95) 74.19,37.81 C17.1 74.14,37.71 DA1.1
+5B: length 45.2
  TOP w0.5: 138.59,31.43 138.59,29.04 arc(138.45,28.71) 138.12,28.57 VD5.2 ; VD16.1 98.44,15.66 98.28,15.82 VD20.1 ; VD1.2 127.97,28.57 arc(128.29,28.71) 128.43,29.04 128.43,31.43 ; v1(108.11,12.38) 106.84,12.38 arc(106.43,12.56) 106.25,12.97 C31.1 106.25,13.07 arc(106.43,13.48) 106.84,13.65 v1(108.11,13.65) ; VD20.1 96.23,15.37 arc(96.09,15.16) 96.05,14.92 v1(96.05,14.46) ; VD20.1 95.08,15.82 94.92,15.66 VD18.1 ; VD20.1 97.13,15.37 arc(97.27,15.16) 97.31,14.92 v1(97.31,14.46) ; DA2.3 87.55,11.19 87.39,11.03 C33.1 v1(88.59,9.21) C32.1 ; v1(118.91,13.65) 117.64,13.65 arc(117.22,13.48) 117.05,13.07 C30.1 117.05,12.97 arc(117.22,12.56) 117.64,12.38 v1(118.91,12.38) ; R24.2 v1(138.47,13.02)
  PWR w0.5: 127.23,31.43 128.43,31.43 ; 128.43,31.43 128.43,30.23 ; 128.43,31.43 129.63,31.43 ; 138.59,30.23 138.59,31.43 ; 138.59,31.43 137.39,31.43 ; 138.59,31.43 139.79,31.43
  BOTTOM w0.5: L1.2 80.62,48.91 arc(80.76,49.12) 80.81,49.36 C4.1 v1(82.23,50.88)
+5B_48: length 31.9
  TOP w0.25: R26.1 100.49,14.03 arc(100.54,14.27) 100.68,14.48 100.94,14.74 arc(101.08,14.95) 101.12,15.19 101.12,16.83 arc(100.94,17.28) 100.49,17.46 98.11,17.46 arc(97.87,17.51) 97.66,17.65 96.05,19.27 VD18.2
  TOP w0.5: VD18.2 93.5,34.05 arc(93.67,34.45) 94.06,34.61 X5.8 X5.10
+5B_220: length 19.9
  TOP w0.25: VD16.2 99.92,19.27 102.84,16.35 arc(102.98,16.15) 103.03,15.9 R23.1
  TOP w0.5: X5.4 X5.2 95.41,24.71 arc(95.46,24.47) 95.6,24.26 97.76,22.1 arc(97.9,21.89) 97.95,21.65 97.95,20.27 arc(98,20.03) 98.14,19.82 98.5,19.46 arc(98.7,19.32) 98.95,19.27 VD16.2
+5B_FI: length 21.5
  TOP w0.25: DD2.2 v1(53.26,42.23) ; DD2.6 45.52,43.5 arc(45.28,43.45) 45.08,43.31 v1(44.61,42.85) 45.04,42.42 arc(45.25,42.28) 45.49,42.23 DD2.7
  TOP w0.5: R1.2 v1(56.38,44.9) ; DD2.8 v1(44.85,40.96) ; R2.1 v1(54.55,40.96)
  PWR w0.5: 66.47,51.12 DD4.2 ; DD4.2 67.47,50.12 ; DD4.2 67.47,52.12 ; DD4.2 68.47,51.12
  BOTTOM w0.5: v1(44.85,40.96) C1.1 ; DD4.2 67.47,50.1 arc(67.49,49.98) 67.56,49.88 67.68,49.76 arc(67.82,49.56) 67.86,49.31 C2.1 ; L1.1 78.45,48.91 arc(78.31,49.12) 78.27,49.36 C3.1 v1(76.84,50.88)
CLK: length 7.1
  TOP w0.25: DD5.3 51.04,31.45 53.57,33.99 arc(53.78,34.13) 54.02,34.17 DD1.40
CV: length 23.2
  TOP w0.25: DD1.62 63.32,28.23 arc(63.37,27.98) 63.51,27.78 64.11,27.18 arc(64.32,27.04) 64.56,26.99 71.02,26.99 arc(71.26,26.94) 71.47,26.8 72.36,25.91 arc(72.5,25.7) 72.55,25.46 72.55,18.36 arc(72.5,18.12) 72.36,17.91 71.47,17.02 arc(71.26,16.88) 71.02,16.83 DD6.6
EQ: length 17.2
  TOP w0.25: DD6.29 57.12,16.03 arc(56.88,16.08) 56.67,16.22 54.96,17.93 arc(54.82,18.14) 54.77,18.38 54.77,21.65 arc(54.82,21.89) 54.96,22.1 58.33,25.47 arc(58.47,25.68) 58.52,25.92 DD1.50
F_RX: length 24.8
  TOP w0.25: DD1.32 58.12,39.25 arc(58.07,39.49) 57.93,39.7 57.84,39.8 arc(57.7,40) 57.65,40.25 R2.2
  TOP w0.5: DD4.6 68.93,52.58 arc(68.72,52.44) 68.48,52.39 62.02,52.39 arc(61.78,52.34) 61.57,52.2 57.84,48.47 arc(57.7,48.27) 57.65,48.02 R2.2
F_TX: length 7
  TOP w0.25: DD2.1 52.6,40.96 arc(52.84,40.91) 53.05,40.77 53.95,39.88 arc(54.15,39.74) 54.4,39.69 54.51,39.69 arc(54.75,39.64) 54.96,39.5 56.76,37.7 arc(56.9,37.5) 56.95,37.25 DD1.33
JA0: length 11.8
  TOP w0.25: DD1.55 60.52,25.95 arc(60.57,25.7) 60.71,25.5 61.57,24.64 arc(61.78,24.5) 62.02,24.45 65.56,24.45 arc(65.92,24.31) 66.06,23.95 DD6.14
JA1: length 11.7
  TOP w0.25: DD1.54 60.12,25.08 arc(60.17,24.83) 60.31,24.63 60.93,24 arc(61.14,23.86) 61.38,23.82 65.08,23.82 arc(65.21,23.76) 65.26,23.63 DD6.15
LOS: length 21.8
  TOP w0.25: DD6.7 70.55,17.63 arc(70.79,17.68) 71,17.82 71.73,18.55 arc(71.87,18.75) 71.92,19 71.92,24.82 arc(71.87,25.06) 71.73,25.27 70.83,26.17 arc(70.63,26.31) 70.38,26.36 63.92,26.36 arc(63.68,26.4) 63.47,26.54 63.11,26.91 arc(62.97,27.11) 62.92,27.36 DD1.61
LOS_E1: length 36
  TOP w0.25: R10.1 74.75,9.88 arc(74.8,10.12) 74.94,10.33 76.17,11.56 arc(76.31,11.77) 76.36,12.01 76.36,29.27 arc(76.31,29.51) 76.17,29.72 74.64,31.25 arc(74.44,31.39) 74.19,31.43 69.64,31.43 arc(69.4,31.48) 69.19,31.62 68.29,32.52 arc(68.15,32.72) 68.11,32.97 68.11,34.61 arc(68,34.87) 67.74,34.98 DD1.11
LOS_FI: length 36.4
  TOP w0.25: DD1.13 68.74,35.77 arc(69.19,35.59) 69.38,35.14 69.38,34.24 arc(69.42,33.99) 69.56,33.79 70.46,32.89 arc(70.67,32.75) 70.91,32.7 75.46,32.7 arc(75.71,32.66) 75.91,32.52 77.44,30.99 arc(77.58,30.78) 77.63,30.54 77.63,11.29 arc(77.68,11.04) 77.82,10.84 78.38,10.27 arc(78.51,10.08) R7.1
LP0: length 12
  TOP w0.25: DD6.24 56.86,20.03 arc(56.73,20.08) 56.67,20.21 56.67,21.01 arc(56.72,21.25) 56.86,21.46 59.13,23.73 arc(59.27,23.94) 59.32,24.18 DD1.52
LP1: length 13.1
  TOP w0.25: DD1.51 58.92,25.05 arc(58.87,24.81) 58.73,24.6 56.23,22.1 arc(56.09,21.89) 56.04,21.65 56.04,20.27 arc(56.09,20.02) 56.23,19.82 56.63,19.42 arc(56.84,19.28) 57.08,19.23 DD6.25
MCLK: length 19.7
  TOP w0.25: DD1.60 62.52,26.23 arc(62.67,25.87) 63.02,25.72 69.75,25.72 arc(69.99,25.67) 70.2,25.53 71.09,24.64 arc(71.23,24.43) 71.28,24.19 71.28,20.31 arc(71.23,20.07) 71.09,19.86 70.65,19.42 arc(70.44,19.28) 70.2,19.23 DD6.9
MONT: length 7.3
  TOP w0.25: DD1.53 59.72,23.69 59.66,23.63 DD6.22
RCLK: length 26
  TOP w0.25: DD1.64 65.61,29.8 arc(65.86,29.75) 66.06,29.61 66.59,29.08 arc(66.8,28.94) 67.04,28.89 71.65,28.89 arc(71.9,28.85) 72.1,28.71 73.63,27.18 arc(73.77,26.97) 73.82,26.73 73.82,17.09 arc(73.77,16.85) 73.63,16.64 72.41,15.42 arc(72.2,15.28) 71.96,15.23 DD6.4
RD: length 24.8
  TOP w0.25: DD1.63 63.72,28.72 arc(63.86,28.4) 64.18,28.26 71.02,28.26 arc(71.26,28.21) 71.47,28.07 73,26.54 arc(73.14,26.33) 73.19,26.09 73.19,17.73 arc(73.14,17.48) 73,17.28 71.94,16.22 arc(71.73,16.08) 71.49,16.03 DD6.5
RRING: length 5.5
  TOP w0.5: X4.2 F2.2
RTIP: length 9.7
  TOP w0.5: F1.2 30.64,40.75 28.61,42.78 28.61,45.87 X4.1
SHLD: length 44.4
  BOTTOM w1: 13.49,55.56 14.58,56.65 arc(14.78,56.79) 15.03,56.84 29.74,56.84 arc(29.98,56.79) 30.19,56.65 31.09,55.75 arc(31.23,55.55) 31.27,55.3 31.27,52.65 arc(31.23,52.41) 31.09,52.2 30.32,51.43 arc(30.18,51.23) 30.13,50.98 X4.SHIELD1 30.45,50.63 arc(30.59,50.42) 30.64,50.18 C25.1 ; 13.49,55.56 12.12,54.19 arc(11.91,54.05) 11.67,54 TP1.1 ; 13.49,55.56 13.49,52.65 arc(13.54,52.41) 13.68,52.2 14.46,51.42 arc(14.6,51.22) 14.65,50.97 X4.SHIELD2
SW_INV: length 42.7
  TOP w0.25: DD1.20 62.92,41.23 arc(62.97,41.47) 63.11,41.68 64.11,42.68 arc(64.32,42.82) 64.56,42.87 91.34,42.87 arc(91.58,42.91) 91.79,43.05 97.76,49.03 arc(97.9,49.24) 97.95,49.48 SW1.14
SW_JA0: length 40
  TOP w0.25: SW1.12 92.87,49.48 arc(92.82,49.24) 92.68,49.03 87.98,44.32 arc(87.77,44.18) 87.53,44.13 63.29,44.13 arc(63.05,44.09) 62.84,43.95 61.11,42.22 arc(60.97,42.01) 60.92,41.77 DD1.25
SW_JA1: length 41.1
  TOP w0.25: SW1.13 95.41,49.48 arc(95.36,49.24) 95.22,49.03 89.88,43.69 arc(89.68,43.55) 89.43,43.5 63.92,43.5 arc(63.68,43.45) 63.47,43.31 62.71,42.55 arc(62.57,42.34) 62.52,42.1 DD1.21
SW_LHAUL: length 46
  TOP w0.25: DD1.18 63.72,39.49 arc(63.77,39.73) 63.91,39.94 65.38,41.41 arc(65.59,41.55) 65.83,41.59 95.15,41.59 arc(95.39,41.64) 95.6,41.78 102.84,49.03 arc(102.98,49.24) 103.03,49.48 SW1.16
SW_LP0: length 35.4
  TOP w0.25: DD1.30 58.92,43.58 arc(58.97,43.82) 59.11,44.03 60.93,45.85 arc(61.14,45.99) 61.38,46.04 81.81,46.04 arc(82.06,46.09) 82.26,46.23 85.06,49.03 arc(85.2,49.24) 85.25,49.48 SW1.9
SW_LP1: length 36.7
  TOP w0.25: SW1.10 87.79,49.48 arc(87.74,49.24) 87.6,49.03 84.17,45.59 arc(83.96,45.45) 83.72,45.41 62.02,45.41 arc(61.78,45.36) 61.57,45.22 60.31,43.96 arc(60.17,43.75) 60.12,43.51 DD1.27
SW_LP2: length 38.3
  TOP w0.25: SW1.11 90.33,49.48 arc(90.28,49.24) 90.14,49.03 86.07,44.96 arc(85.87,44.82) 85.62,44.77 62.65,44.77 arc(62.41,44.72) 62.2,44.58 60.71,43.09 arc(60.57,42.88) 60.52,42.64 DD1.26
SW_MCLK: length 44.4
  TOP w0.25: DD1.19 63.32,40.36 arc(63.37,40.6) 63.51,40.81 64.74,42.04 arc(64.95,42.18) 65.19,42.23 93.24,42.23 arc(93.49,42.28) 93.69,42.42 100.3,49.03 arc(100.44,49.24) 100.49,49.48 SW1.15
TCK: length 22.1
  TOP w0.25: DD1.14 69.47,36.17 arc(69.72,36.13) 69.92,35.99 70.14,35.77 arc(70.35,35.63) 70.59,35.59 R6.2 75.76,35.59 arc(76,35.54) 76.21,35.4 78.71,32.89 arc(78.85,32.68) 78.9,32.44 78.9,30.8 arc(79.09,30.35) 79.53,30.16 81.81,30.16 arc(82.06,30.12) 82.26,29.98 X2.1
TCLK: length 30.5
  TOP w0.25: DD6.1 72.1,12.83 arc(72.34,12.88) 72.55,13.02 74.9,15.37 arc(75.04,15.58) 75.09,15.82 75.09,28 arc(75.04,28.24) 74.9,28.45 73.37,29.98 arc(73.17,30.12) 72.92,30.16 68.31,30.16 arc(68.07,30.21) 67.86,30.35 67.02,31.19 arc(66.82,31.33) 66.57,31.38 DD1.2
TD: length 28
  TOP w0.25: DD6.2 71.63,13.63 arc(71.87,13.68) 72.08,13.82 74.27,16.01 arc(74.41,16.21) 74.45,16.46 74.45,27.36 arc(74.41,27.6) 74.27,27.81 72.74,29.34 arc(72.53,29.48) 72.29,29.53 67.91,29.53 arc(67.67,29.58) 67.46,29.72 66.39,30.79 arc(66.18,30.93) 65.94,30.98 DD1.1
TDI: length 22.1
  TOP w0.25: X2.9 82.26,37.97 arc(82.05,37.83) 81.81,37.78 75.35,37.78 arc(75.11,37.83) 74.9,37.97 73.82,39.05 73.03,39.84 arc(72.83,39.98) 72.58,40.03 R3.1 arc(71.05,39.98) 70.85,39.85 70.24,39.24 arc(70.04,39.1) 69.79,39.05 67.1,39.05 arc(66.86,39.1) 66.65,39.24 66.39,39.5 arc(66.18,39.64) 65.94,39.69 65.25,39.69 arc(65.01,39.64) 64.8,39.5 64.31,39.01 arc(64.17,38.81) 64.12,38.56 DD1.17
TDO: length 20.1
  TOP w0.25: DD1.15 76.04,36.58 arc(76.28,36.53) 76.49,36.39 79.98,32.89 arc(80.19,32.75) 80.43,32.7 81.81,32.7 arc(82.06,32.66) 82.26,32.52 X2.3
TMS: length 20
  TOP w0.25: X2.5 82.26,35.06 arc(82.06,35.2) 81.81,35.24 79.16,35.24 arc(78.92,35.29) 78.71,35.43 77.18,36.97 arc(76.97,37.1) 76.73,37.15 70.18,37.15 arc(69.94,37.2) 69.73,37.34 69.17,37.9 arc(68.97,38.03) R4.1 arc(68.51,38.03) 68.31,37.9 67.57,37.16 arc(67.37,37.02) 67.12,36.98 DD1.16
TP0: length 23
  TOP w0.25: X1.1 45.06,22.36 arc(45.26,22.5) 45.51,22.55 53.87,22.55 arc(54.11,22.59) 54.32,22.73 55.83,24.24 arc(55.96,24.44) 56.01,24.68 56.01,26.75 arc(56.06,27) 56.2,27.2 57.93,28.94 arc(58.07,29.14) 58.12,29.39 DD1.49
TP1: length 22.3
  TOP w0.25: X1.2 43.15,22.99 arc(43.36,23.13) 43.6,23.18 53.24,23.18 arc(53.48,23.23) 53.69,23.37 55.25,24.93 arc(55.38,25.13) 55.43,25.38 55.43,29.87 arc(55.48,30.12) 55.62,30.32 56.08,30.79 arc(56.29,30.93) 56.53,30.98 DD1.48
TP2: length 21.7
  TOP w0.25: 41.44,23.82 52.6,23.82 arc(52.84,23.86) 53.05,24 54.58,25.53 arc(54.72,25.74) 54.77,25.98 54.77,30.8 arc(54.94,31.21) 55.34,31.38 DD1.47
TP3: length 22.3
  TOP w0.25: X1.4 43.15,24.64 arc(43.36,24.5) 43.6,24.45 51.97,24.45 arc(52.21,24.5) 52.42,24.64 53.95,26.17 arc(54.09,26.37) 54.13,26.62 54.13,31.43 arc(54.23,31.68) 54.48,31.77 DD1.46
TP4: length 23
  TOP w0.25: X1.5 42.52,27.81 arc(42.66,27.61) 42.7,27.36 42.7,27.25 arc(42.75,27.01) 42.89,26.8 44.42,25.27 arc(44.63,25.13) 44.87,25.09 51.33,25.09 arc(51.57,25.13) 51.78,25.27 53.31,26.8 arc(53.45,27.01) 53.5,27.25 53.5,31.54 arc(53.69,31.99) 54.13,32.17 56.95,32.17
TP5: length 17.7
  TOP w0.25: X1.6 42.52,32.52 arc(42.66,32.72) 42.7,32.97 42.7,33.08 arc(42.75,33.32) 42.89,33.53 45.13,35.77 arc(45.34,35.9) 45.58,35.95 55.33,35.95 55.51,35.77 DD1.36
TP6: length 16.6
  TOP w0.25: X1.7 43.79,36.33 arc(43.99,36.47) 44.24,36.52 55.16,36.52 arc(55.39,36.47) 55.58,36.34 arc(55.76,36.22) 55.98,36.17 DD1.35
TP7: length 16.1
  TOP w0.25: X1.8 42.12,37.2 arc(42.32,37.33) 42.56,37.38 54.91,37.38 arc(55.15,37.33) 55.36,37.2 55.79,36.76 arc(56,36.62) 56.24,36.58 DD1.34
TRING: length 12.2
  TOP w0.4: 21.75,46.04 21.75,44.13
  TOP w0.5: F4.2 15.4,40.38 17.25,42.23 19.84,42.23 21.75,44.13 ; X4.5 21.75,46.04
TTIP: length 6.6
  TOP w0.5: X4.4 23.02,43.29 20.48,40.75 F3.2
N930427: length 23.2
  TOP w0.5: VD2.2 123.7,47.86 arc(123.75,47.61) 123.89,47.41 125.07,46.23 arc(125.21,46.02) 125.25,45.78 125.25,39.61 arc(125.09,39.22) 124.7,39.05 K1.9
  TOP w1: VD2.2 123.7,50.72 arc(123.66,50.95) 123.53,51.14 arc(123.4,51.34) 123.35,51.56 X3.1
  BOTTOM w0.5: K1.4 K1.9
N930443: length 27
  TOP w0.5: VD2.1 128.08,47.98 arc(128.03,47.74) 127.89,47.53 126.71,46.35 arc(126.57,46.14) 126.53,45.9 126.53,37.15 arc(126.34,36.7) 125.89,36.52 123.35,36.52
  TOP w1: VD2.1 128.08,50.72 arc(128.12,50.95) 128.25,51.14 arc(128.38,51.34) 128.43,51.56 X3.2
  BOTTOM w0.5: 128.43,36.52 123.35,36.52
N930725: length 7.8
  TOP w0.5: R5.2 122.72,26.99 arc(122.9,27.44) 123.35,27.62 VD1.3 124.81,28 arc(124.77,28.24) 124.63,28.45 123.54,29.54 arc(123.4,29.74) 123.35,29.99 123.35,31.43
N1544031: length 23.2
  TOP w0.5: K2.9 134.86,39.05 arc(135.25,39.22) 135.41,39.61 135.41,45.9 arc(135.37,46.14) 135.23,46.35 134.05,47.53 arc(133.91,47.73) 133.86,47.98 VD6.2
  TOP w1: X3.3 133.51,51.56 arc(133.56,51.34) 133.69,51.14 arc(133.82,50.95) 133.86,50.72 VD6.2
  BOTTOM w0.5: K2.4 K2.9
N1544059: length 27
  TOP w0.5: 133.51,36.52 136.05,36.52 arc(136.5,36.7) 136.69,37.15 136.69,45.9 arc(136.73,46.14) 136.87,46.35 138.05,47.53 arc(138.19,47.73) 138.24,47.98 VD6.1
  TOP w1: X3.4 138.59,51.56 arc(138.54,51.34) 138.41,51.14 arc(138.28,50.95) 138.24,50.72 VD6.1
  BOTTOM w0.5: 138.59,36.52 133.51,36.52
N1544095: length 7.8
  TOP w0.5: 133.51,31.43 133.51,29.79 arc(133.56,29.55) 133.7,29.34 134.79,28.25 arc(134.93,28.05) 134.97,27.8 VD5.3 133.51,27.62 arc(133.06,27.44) 132.88,26.99 R11.2
N1545189: length 4.1
  TOP w0.25: VD19.1 142.66,15.56 arc(142.42,15.51) 142.21,15.37 141.66,14.82 arc(141.52,14.61) 141.47,14.37 R24.1
N1624810: length 3.1
  TOP w0.25: R18.2 32.38,7.01 arc(32.61,6.97) 32.79,6.84 arc(32.98,6.71) 33.2,6.67 TR1.15
N1624814: length 5.1
  TOP w0.25: R15.2 R14.2 51.94,8.97 51.84,9.07 C19.2
N1624836: length 35.4
  TOP w0.5: v1(26.2,20.08) 26.2,18.83 arc(26.09,18.58) 25.84,18.48 VD15.2 25.28,18.48 arc(25.03,18.58) 24.93,18.83 v1(24.93,20.08) ; v1(21.11,20.08) 21.11,18.83 arc(21.01,18.58) 20.76,18.48 VD12.1 20.2,18.48 arc(19.95,18.58) 19.84,18.83 v1(19.84,20.08) ; R17.1 v1(31.27,15.68) ; R18.1 v1(31.27,4.01) ; v1(30,20.08) 30,18.83 arc(30.11,18.58) 30.36,18.48 VD14.1 30.92,18.48 arc(31.17,18.58) 31.27,18.83 v1(31.27,20.08) ; v1(16.04,20.08) 16.04,18.83 arc(15.93,18.58) 15.68,18.48 VD13.1 15.12,18.48 arc(14.87,18.58) 14.77,18.83 v1(14.77,20.08)
  BOTTOM w0.25: 28.59,39.47 C25.2 ; C25.2 32.69,39.47 ; C25.2 30.64,38.52 ; R19.1 25.34,39.98 ; R19.1 24.29,39.18 ; R19.1 23.24,39.98 ; R20.1 22.8,39.98 ; R20.1 20.7,39.98 ; R20.1 21.75,39.18 ; 16.67,39.18 R22.1 ; R22.1 15.62,39.98 ; R22.1 17.72,39.98 ; 19.21,39.18 R21.1 ; R21.1 20.26,39.98 ; R21.1 18.16,39.98
  vias: v1(13.43,35.24) v1(13.49,26.36) v1(13.49,15.56) v1(16.04,4.13) v1(16.67,10.48) v1(17.88,35.24) v1(17.94,26.36) v1(22.96,35.24) v1(23.02,26.36) v1(23.02,16.83) v1(23.02,9.85) v1(23.02,4.13) v1(28.04,35.24) v1(28.1,26.36) v1(31.27,9.85) v1(32.48,35.24) v1(32.55,26.36)
N1624848: length 6.3
  TOP w0.25: TR1.16 33.44,5.4 arc(33.2,5.45) 32.99,5.59 32.73,5.85 arc(32.52,5.99) 32.28,6.04 L3.1
N1624856: length 6.3
  TOP w0.25: L3.2 32.28,8.57 arc(32.52,8.53) 32.73,8.39 32.99,8.13 arc(33.2,7.99) 33.44,7.94 TR1.14
N1624864: length 3.1
  TOP w0.25: R17.2 32.38,12.68 arc(32.61,12.72) 32.79,12.85 arc(32.98,12.98) 33.2,13.02 TR1.10
N1624906: length 6.3
  TOP w0.25: TR1.11 33.44,11.75 arc(33.2,11.7) 32.99,11.56 32.73,11.3 arc(32.52,11.16) 32.28,11.12 L3.3
N1624970: length 6.3
  TOP w0.25: L3.4 32.28,13.65 arc(32.52,13.7) 32.73,13.84 32.99,14.1 arc(33.2,14.24) 33.44,14.29 TR1.9
N1625492: length 5.7
  BOTTOM w0.4: 24.29,44.13 24.29,46.04
  BOTTOM w0.5: R19.2 24.29,44.13 ; 24.29,46.04 X4.3
N1625496: length 3.7
  BOTTOM w0.5: X4.6 21.56,44.03 arc(21.7,43.82) 21.75,43.58 R20.2
N1625500: length 5.7
  BOTTOM w0.4: 19.21,44.13 19.21,46.04
  BOTTOM w0.5: R21.2 19.21,44.13 ; 19.21,46.04 X4.7
N1625504: length 3.7
  BOTTOM w0.5: R22.2 16.67,43.58 arc(16.72,43.82) 16.86,44.03 X4.8
N1631299: length 8
  TOP w0.5: 66.06,11.15 66.06,10.1 arc(66.11,9.87) v1(66.23,9.68)
  BOTTOM w0.5: L4.1 69.69,11.12 arc(69.53,11.08) 69.4,10.99 arc(69.27,10.91) 69.11,10.88 C29.1 C28.1 65.56,10.61 arc(65.61,10.36) 65.75,10.16 v1(66.23,9.68)
N1637829: length 21.9
  TOP w0.25: 62.06,11.15 62.06,9.78 arc(62.01,9.53) 61.87,9.33 61.22,8.68 arc(61.08,8.47) 61.03,8.23 61.03,5.8 arc(60.99,5.55) 60.85,5.35 60.45,4.95 arc(60.24,4.81) 60,4.76 VD7.4 56.94,4.76 arc(56.69,4.81) 56.49,4.95 54.32,7.12 arc(54.18,7.33) 54.13,7.57 54.13,12.38 arc(53.95,12.83) 53.5,13.02 C20.1
N1638775: length 3.3
  TOP w0.25: 66.86,11.15 66.86,10.72 arc(66.91,10.47) 67.05,10.27 67.92,9.4 arc(68.06,9.19) 68.11,8.95 R16.2
N1725933: length 69.6
  TOP w0.25: VD21.1 143.3,20.64 arc(143.06,20.59) 142.85,20.45 129.25,6.86 arc(129.05,6.72) 128.8,6.67 100.12,6.67 arc(99.88,6.62) 99.67,6.48 98.14,4.95 arc(97.93,4.81) 97.69,4.76 R25.2
N1741968: length 2.2
  TOP w0.5: VT1.3 124.19,23.82 arc(124,23.85) 123.84,23.96 arc(123.67,24.07) 123.48,24.11 R5.1
N1742482: length 60.6
  TOP w0.25: 126.97,22.86 126.97,21.77 126.86,21.67 R9.2 126.86,11.38 arc(126.82,11.14) 126.68,10.93 125.15,9.4 arc(124.94,9.26) 124.7,9.21 97.58,9.21 arc(97.34,9.16) 97.13,9.02 95.6,7.49 arc(95.39,7.35) 95.15,7.3 84.24,7.3 arc(84,7.35) 83.79,7.49 81.63,9.66 arc(81.42,9.8) 81.18,9.85 R7.2
N1747861: length 2.2
  TOP w0.5: VT2.3 134.35,23.82 arc(134.16,23.85) 134,23.96 arc(133.83,24.07) 133.64,24.11 R11.1
N1748088: length 69.6
  TOP w0.25: 137.12,22.86 137.12,21.77 137.03,21.67 R13.2 137.03,19.88 arc(136.98,19.63) 136.84,19.43 126.17,8.76 arc(125.97,8.62) 125.72,8.57 98.21,8.57 arc(97.97,8.53) 97.76,8.39 96.23,6.86 arc(96.03,6.72) 95.78,6.67 83.61,6.67 arc(83.37,6.72) 83.16,6.86 81.63,8.39 arc(81.42,8.53) 81.18,8.57 R10.2
N1759880: length 40.6
  TOP w0.25: DD1.12 68.11,35.38 arc(68.55,35.19) 68.74,34.74 68.74,33.6 arc(68.79,33.36) 68.93,33.15 69.82,32.26 arc(70.03,32.12) 70.27,32.07 74.83,32.07 arc(75.07,32.02) 75.28,31.88 76.81,30.35 arc(76.95,30.14) 77,29.9 77,11.38 arc(76.95,11.13) 76.81,10.93 75.91,10.03 arc(75.77,9.82) 75.72,9.58 75.72,7.94 arc(75.91,7.49) 76.36,7.3 R12.1
N1759884: length 36.7
  TOP w0.25: DD1.3 67.5,31.77 arc(67.75,31.73) 67.95,31.59 68.55,30.99 arc(68.76,30.85) 69,30.8 73.56,30.8 arc(73.8,30.75) 74.01,30.61 75.54,29.08 arc(75.68,28.87) 75.72,28.63 75.72,12.65 arc(75.68,12.4) 75.54,12.2 73.37,10.03 arc(73.23,9.82) 73.19,9.58 73.19,6.67 arc(73.37,6.22) 73.82,6.04 R8.1
N1760125: length 76.9
  TOP w0.25: VD3.1 141.95,24 arc(141.81,23.8) 141.76,23.55 141.76,21.54 arc(141.72,21.3) 141.58,21.09 127.98,7.49 arc(127.78,7.35) 127.53,7.3 99.48,7.3 arc(99.24,7.26) 99.03,7.12 97.5,5.59 arc(97.3,5.45) 97.05,5.4 82.34,5.4 arc(82.1,5.45) 81.89,5.59 81.63,5.85 arc(81.42,5.99) 81.18,6.04 R8.2
N1760541: length 77.5
  TOP w0.25: VD4.1 140.68,27.81 arc(140.54,27.61) 140.5,27.36 140.5,21.54 arc(140.45,21.3) 140.31,21.09 127.35,8.13 arc(127.14,7.99) 126.9,7.94 98.85,7.94 arc(98.61,7.89) 98.4,7.75 96.87,6.22 arc(96.66,6.08) 96.42,6.04 82.97,6.04 arc(82.73,6.08) 82.52,6.22 81.63,7.12 arc(81.42,7.26) 81.18,7.3 R12.2
N1763106: length 51.2
  TOP w0.25: R26.2 v1(100.49,10.36) ; VD22.1 135.68,10.48 arc(135.43,10.43) 135.23,10.29 130.52,5.59 arc(130.31,5.45) 130.07,5.4 v1(100.49,5.4)
  BOTTOM w0.25: v1(100.49,10.36) v1(100.49,5.4)
N1775019: length 48.4
  TOP w0.25: R23.2 v1(103.03,10.36) ; v1(103.03,4.13) 130.71,4.13 arc(130.95,4.18) 131.16,4.32 132.05,5.21 arc(132.26,5.35) 132.5,5.4 VD17.1
  BOTTOM w0.25: v1(103.03,10.36) v1(103.03,4.13)
N1823155: length 17.4
  TOP w0.5: DD3.6 DD3.7 DD3.2 48.42,45.85 arc(48.47,45.6) 48.61,45.4 50.32,43.69 arc(50.53,43.55) 50.77,43.5 DD2.3 R1.1
N1852309: length 2.6
  BOTTOM w0.5: C16.2 75.97,31.34 76.04,31.41 DA1.4

## Copper pours and planes (outline as drawn; the poured copper is in the pictures)
GND on TOP (solid shape): 83.01,12.63 82.2,11.64 81.36,12.5 81.32,12.63 81.36,12.77 82.2,13.62
GND on TOP (solid shape): 51.05,27.61 49.99,26.66 49.15,27.47 49.1,27.61 49.15,27.74 49.99,28.55
GND on TOP (solid shape): 83.7,11.63 83.09,10.93 82.95,10.89 82.81,10.93 82.2,11.63 82.95,12.7
GND on TOP (solid shape): 96.74,11.49 95.53,10.73 94.81,11.35 94.77,11.49 94.81,11.63 95.53,12.25
GND on TOP (solid shape): 98.55,11.63 98.59,11.49 98.55,11.35 97.83,10.73 96.62,11.49 97.83,12.25
GND on TOP (solid shape): 112.56,13.04 111.5,11.96 110.56,12.16 110.43,12.32 110.46,12.52 111.31,13.37
GND on TOP (solid shape): 112.56,13 111.31,12.67 110.46,13.52 110.43,13.72 110.56,13.88 111.5,14.09
GND on TOP (solid shape): 123.36,13.04 122.29,11.95 121.35,12.16 121.22,12.32 121.25,12.52 122.1,13.38
GND on TOP (solid shape): 123.36,13 122.1,12.66 121.25,13.52 121.22,13.72 121.35,13.88 122.29,14.09
GND on TOP (solid shape): outline of 329 points within 58.92,12.09 68.4,21.57
GND on BOTTOM (solid shape): outline of 248 points within 58.58,12.38 68.74,20.64
GND on GND (solid shape): 103.78,57.35 103.17,56.65 103.03,56.61 102.89,56.65 102.28,57.35 103.03,58.17
GND on GND: 43.07,56.84 42.36,56.54 42.07,55.84 42.07,4.5 42.36,3.79 43.07,3.5 147.12,3.5 147.82,3.79 148.12,4.5 148.12,31.07 147.82,31.78 147.12,32.07 121.81,32.07 121.1,31.78 120.81,31.07 120.81,30.8 110.02,30.8 110.02,47.31 110.28,47.31 110.99,47.6 111.28,48.31 111.28,55.84 110.99,56.54 110.28,56.84
(no net) on TOP: 57.95,12.38 59.22,12.38 59.22,11.12 68.11,11.12 68.11,12.38 69.38,12.38 69.38,21.27 68.11,21.27 68.11,22.55 59.22,22.55 59.22,21.27 57.95,21.27
(no net) on BOTTOM: 65.56,28.89 66.01,29.08 66.2,29.53 66.2,38.42 66.01,38.87 65.56,39.05 56.67,39.05 56.23,38.87 56.04,38.42 56.04,29.53 56.23,29.08 56.67,28.89
(no net) on BOTTOM: 68.74,12.38 68.74,20.64 58.58,20.64 58.58,12.38
+1.8B on BOTTOM: 66.83,33.34 66.83,29.53 66.46,28.63 65.56,28.26 56.67,28.26 55.78,28.63 55.41,29.53 55.41,30.16 55.78,31.06 57.12,31.62 57.31,32.07 57.31,33.34 57.12,33.79 56.67,33.98 53.5,33.98 53.05,33.79 52.87,33.34 52.87,25.09 53.05,24.64 53.5,24.45 71.92,24.45 72.36,24.64 72.55,25.09 72.55,35.24 72.36,35.69 71.92,35.88 65.56,35.88 65.56,33.34
+3.3B on BOTTOM (solid shape): 60.19,13.18 60.1,12.98 59.89,12.93 58.49,13.45 59.17,14.1 59.94,14.65
+3.3B on BOTTOM (solid shape): 67.57,18.06 67.73,18.19 67.94,18.16 68.79,17.32 68.33,16.14 67.42,17.11
+3.3B on PWR: 43.07,23.18 42.36,22.89 42.07,22.18 42.07,4.5 42.36,3.79 43.07,3.5 77.9,3.5 78.61,3.79 78.9,4.5 78.9,12.29 79.49,13.7 80.9,14.29 90.6,14.29 91.31,14.58 91.6,15.29 91.6,22.18 91.31,22.89 90.6,23.18
+3.3B_CPLD on TOP (solid shape): 45.88,27.61 44.85,27.1 44.42,27.54 44.4,27.61 44.42,27.67 44.85,28.11
+3.3B_CPLD on TOP (solid shape): 47.32,32.47 47.5,32.36 47.54,32.16 46.85,30.5 45.8,31.43 44.85,32.41
+3.3B_CPLD on PWR: 60.22,46.04 59.51,45.75 59.22,45.04 59.22,40.42 58.63,39.01 57.22,38.42 43.07,38.42 42.36,38.13 42.07,37.42 42.07,25.45 42.36,24.74 43.07,24.45 90.6,24.45 91.31,24.74 91.6,25.45 91.6,45.04 91.31,45.75 90.6,46.04
